# Altium PCB PIC32MM-Breakout.PcbDoc
Units mm, origin at the board's own origin, x right, y up, seen from the top; angles counter-clockwise.
Board outline 17.78 x 33.02 mm, 2 copper layers (Top Layer, Bottom Layer), stack 1.569 mm thick; 7 components, 20 nets, 52 pads, 3 vias.
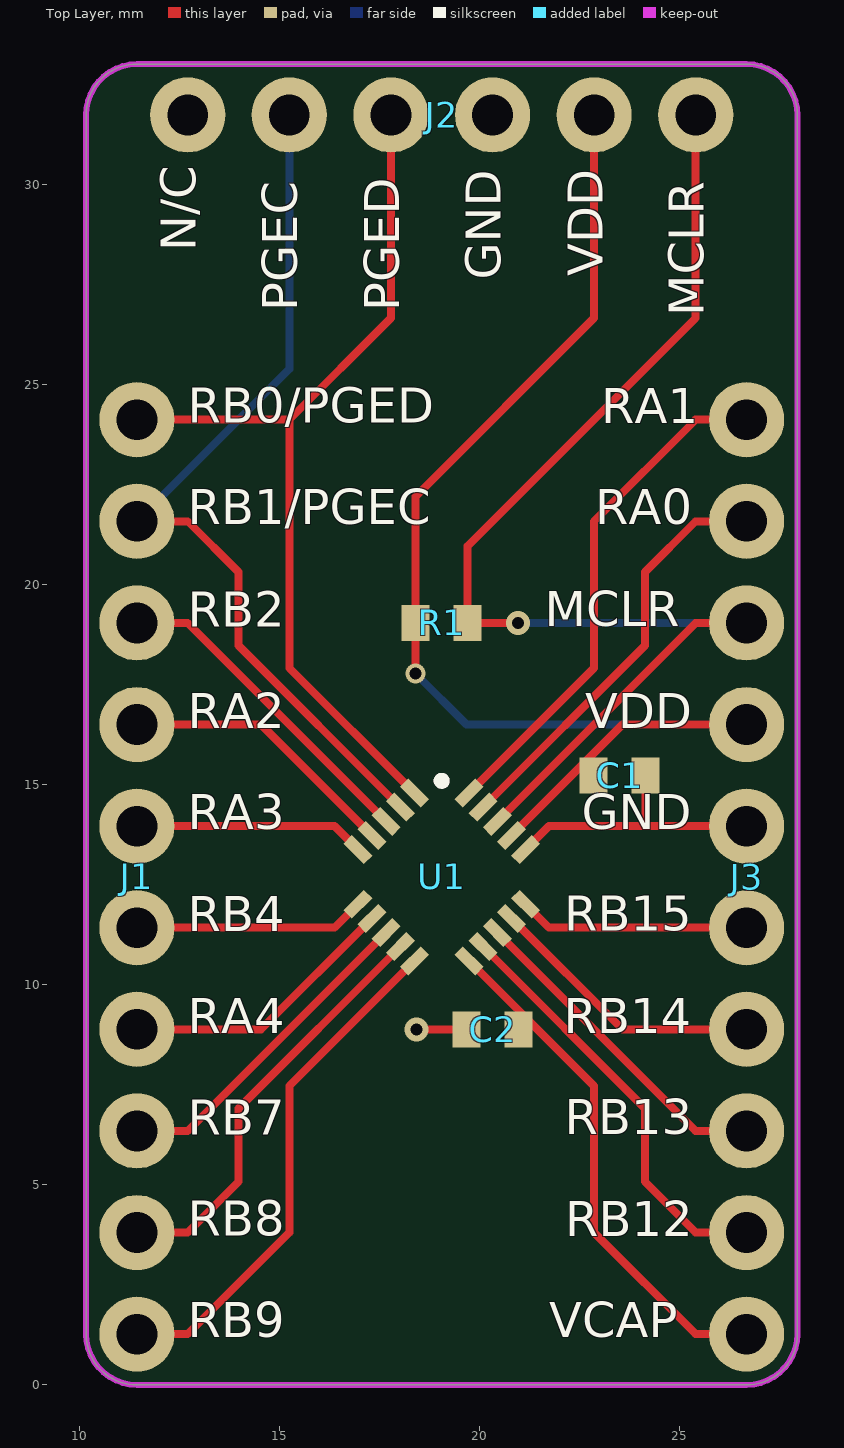
[diagram p0: Top Layer view]
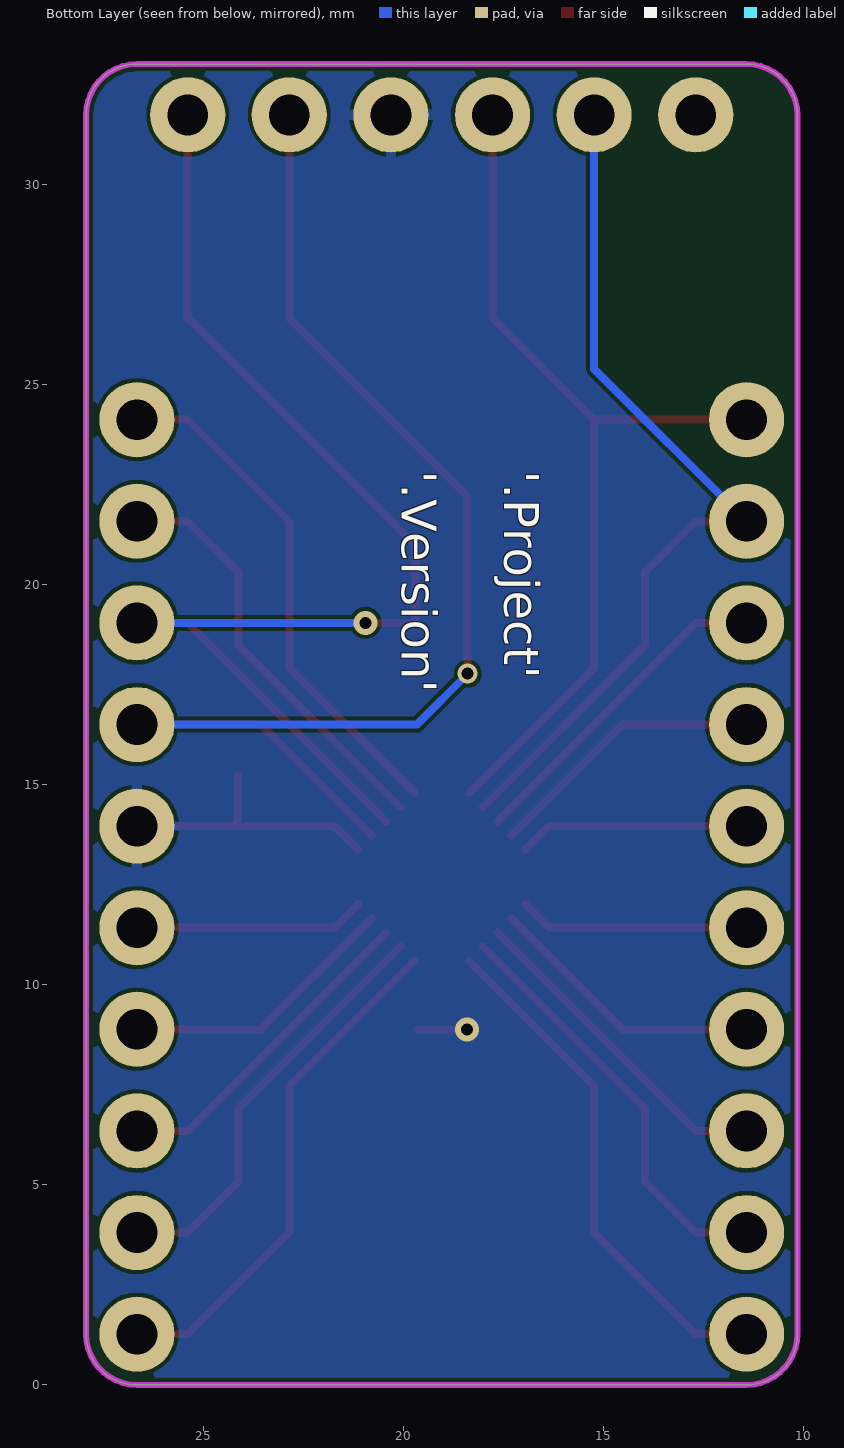
[diagram p1: Bottom Layer view, seen from below]
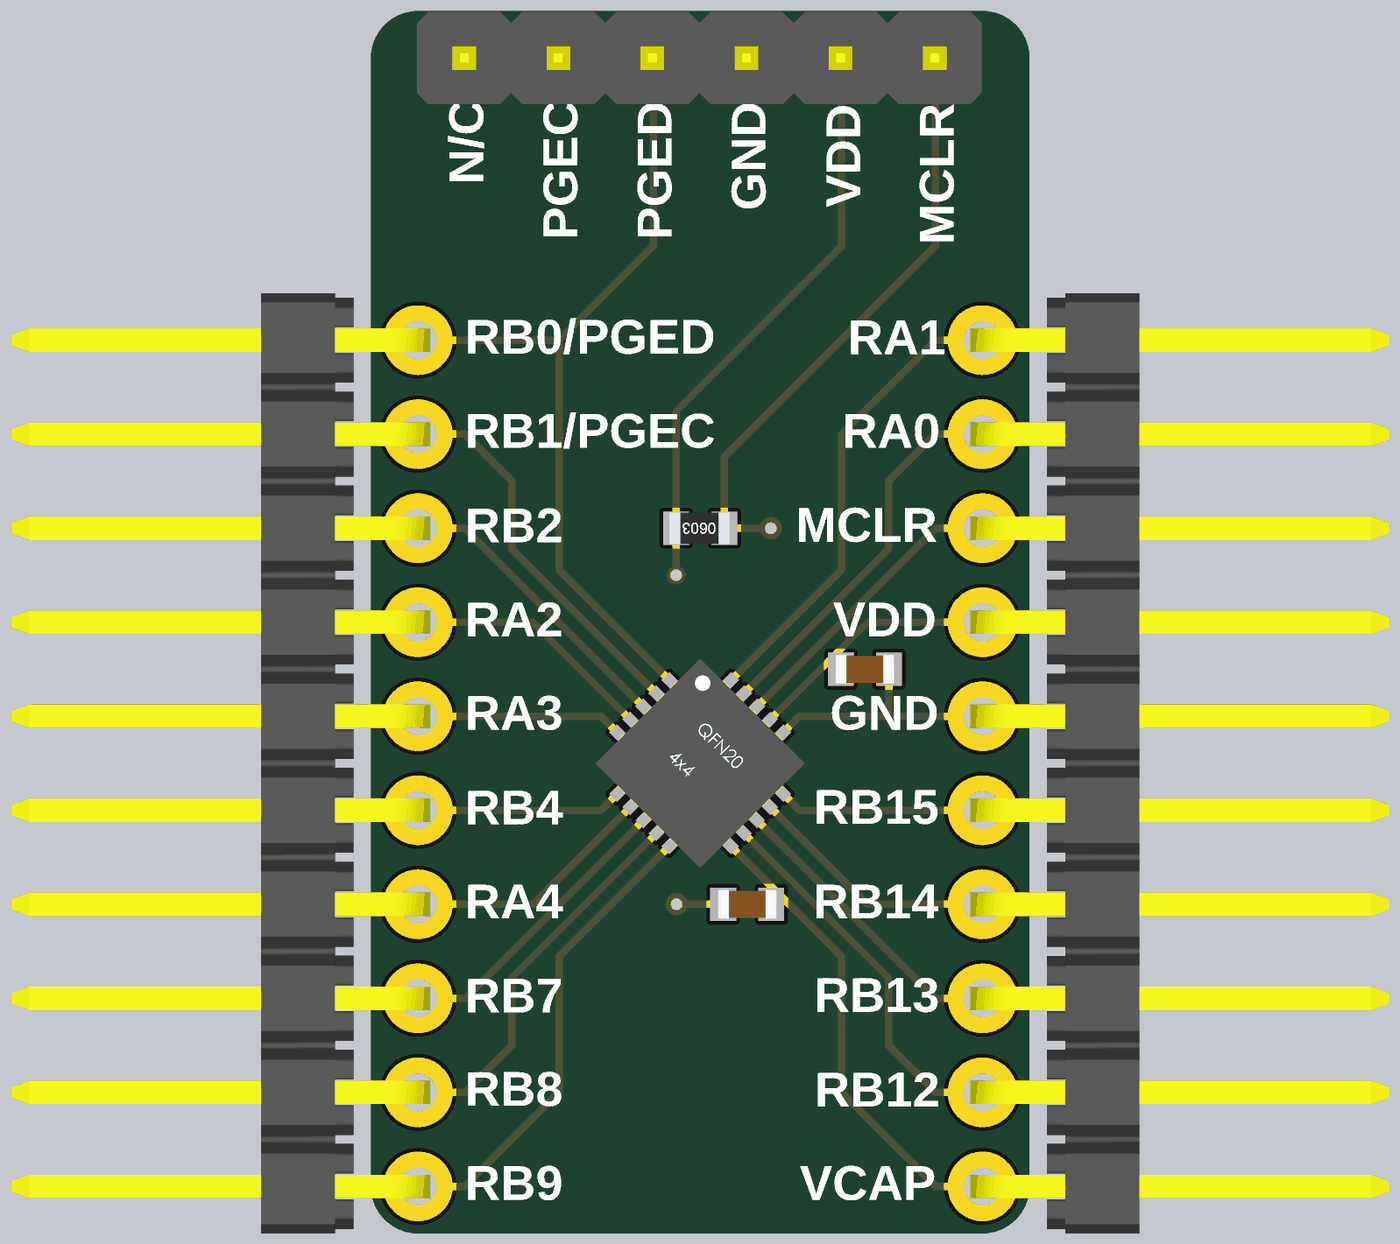
[diagram p2: 3D render of the assembled board from above, using the file's embedded part models]

## Layer stack, top to bottom
Top Solder: solder mask 0.0254, SM-001, Dk 4
Top Layer: signal copper 0.035
Dielectric 1: core 1.4986, Core-043, Dk 4.3
Bottom Layer: signal copper 0.035
Bottom Solder: solder mask 0.0254, SM-001, Dk 4

## Board outline
10.16,1.27 10.16,31.75 cw(c11.43,31.75) 11.43,33.02 26.67,33.02 cw(c26.67,31.75) 27.94,31.75 27.94,1.27 cw(c26.67,1.27) 26.67,0 11.43,0 cw(c11.43,1.27)

## Design rules (kind name [scope] priority, off if disabled: settings)
Clearance [All] p1: gap=0.1 ignorepadtopadclearanceinfootprint=FALSE except(0: Arc-Hole Track-Hole SMDPad-Hole THPad-Hole Via-Hole Fill-Hole Poly-Hole Region-Hole Text-Hole)
DiffPairsRouting [All] p1: maxlimit=0.254 minlimit=0.1 mostfreqgap=0.1 toplayer_minwidth=0.1 toplayer_maxwidth=0.381 toplayer_prefwidth=0.1 bottomlayer_minwidth=0.1 bottomlayer_maxwidth=0.381 bottomlayer_prefwidth=0.1 maxuncoupledlength=12.7
MinimumSolderMaskSliver [All] p1: minsoldermaskwidth=0
PlaneClearance [All] p1: clearance=0.2
PlaneConnect [All] p1: planeconnectstyle=Direct reliefexpansion=0.508 reliefentries=4 reliefconductorwidth=0.254 reliefairgap=0.254
PolygonConnect [All] p1: thpad.connectstyle=Relief thpad.reliefconductorwidth=0.254 thpad.reliefentries=4 thpad.polygonreliefangle="90 Angle" thpad.airgapwidth=0.1 smdpad.connectstyle=Relief smdpad.reliefconductorwidth=0.254 smdpad.reliefentries=4 smdpad.polygonreliefangle="90 Angle" smdpad.airgapwidth=0.1 via.connectstyle=Direct via.reliefconductorwidth=0.254 via.reliefentries=4 via.polygonreliefangle="90 Angle" via.airgapwidth=0.254
RoutingVias [All] p1: holewidth=0.711 width=1.27 viastyle="Through Hole" minholewidth=0.2 minwidth=0.4 maxholewidth=0.711 maxwidth=1.27
SilkToSolderMaskClearance [IsPad] p1: minsilkscreentomaskgap=0.1 clearancetoexposedcopper=TRUE
SolderMaskExpansion [All] p1: expansion=0.102 istentingtop=FALSE
Width [All] p1: maxlimit=1 minlimit=0.1 preferedwidth=0.1
25 further rules are at their usual default settings.

## Classes and differential pairs
component class PIC32MM-Breakout: C1 C2 J1 J2 R1 U1

## Components (designator, comment, footprint, x,y, rotation, side; value= is the part's Value field where it differs from the comment)
C1 "100nF" "Capacitor 0603" 23.495,15.24 r180 top
C2 "10uF" "Capacitor 0603" 20.32,8.89 r0 top
J1 "Molex 90121-0770" "Molex 90121-0770" 11.43,24.13 r0 top
J2 "MOLEX-95501-2661" "Molex 90120-0926" 19.05,31.75 r270 top
J3 "Molex 90121-0770" "Molex 90121-0770" 26.67,1.27 r180 top
R1 "10kR" "Resistor 0603" 19.05,19.05 r180 top
U1 "PIC32MM0064GPL020-I/ML" QFN-20 19.05,12.7 r315 top

## Footprints (in the part's own frame and the unit in brackets; to place one, negate y for a bottom-side part, rotate by r counter-clockwise, add the part's x,y. Pads: shape width x height; smd on the part's side, far side on the other; paste and mask are expansions set on the pad)
"Capacitor 0603" [mm]
  rect 0.7x0.9 smd: 1(-0.65,0) 2(0.65,0)
  body extent -0.8,-0.4 0.8,0.4, height 0.78
"Molex 90120-0926" [mil]
  round 74 hole 40: 1(0,250) 2(0,150) 3(0,50) 4(0,-50) 5(0,-150) 6(0,-250)
  body extent -49,-301 49,299, height 336
"Molex 90121-0770" [mil]
  round 74 hole 40: 1(0,0) 2(0,-100) 3(0,-200) 4(0,-300) 5(0,-400) 6(0,-500) 7(0,-600) 8(0,-700) 9(0,-800) 10(0,-900)
  body extent -433,-950 13,50, height 142
QFN-20 [mm]
  rect 0.73x0.3 smd: 1(-1.965,1) 2(-1.965,0.5) 3(-1.965,0) 4(-1.965,-0.5) 5(-1.965,-1) 11(1.965,-1) 12(1.965,-0.5) 13(1.965,0) 14(1.965,0.5) 15(1.965,1)
  rect 0.3x0.73 smd: 6(-1,-1.965) 7(-0.5,-1.965) 8(0,-1.965) 9(0.5,-1.965) 10(1,-1.965) 16(1,1.965) 17(0.5,1.965) 18(0,1.965) 19(-0.5,1.965) 20(-1,1.965)
  silkscreen extent -1.8,1.6 -1.6,1.8, body extent -2.02,-2.02 2.02,2.02, height 0.8
"Resistor 0603" [mm]
  rect 0.7x0.9 smd: 1(-0.65,0) 2(0.65,0)
  body extent -0.8,-0.42 0.84,0.43, height 0.44

## Part data
C1 C2: library part Capacitor
J2: library part "MPLAB ICSP"
R1: library part Resistor

## Via types
v1: diameter 0.6, hole 0.3, Top Layer to Bottom Layer, tented both sides, 2 vias
v2: diameter 0.5, hole 0.3, Top Layer to Bottom Layer, tented both sides, 1 vias

## Nets (pads, with @x,y where several pads share a name; then routed paths per layer and width w, separated by ;. In a path a pad name is that pad's centre, name@x,y a point inside that pad or via, vN(x,y) a via of type N, cw(c..) or ccw(c..) an arc to the next point about the centre after c; other vN are vias at no path point)
GND: C1.1 C2.1 J2.3 J3.6 U1.16 | length 8.3
  Top Layer w0.2: v1(18.415,8.89) C2.1 ; U1.16 21.734,13.97 24.202,13.97 ; C1.1 24.145,14.027 24.202,13.97 ; J3.6 24.202,13.97
MCLR: J2.1 J3.8 R1.1 U1.18 | length 30.3
  Top Layer w0.2: U1.18 25.4,19.05 J3.8 ; v1(20.955,19.05) R1.1 19.7,20.97 25.4,26.67 J2.1
  Bottom Layer w0.2: v1(20.955,19.05) J3.8
RA0: J3.9 U1.19 | length 10.6
  Top Layer w0.2: U1.19 24.13,18.487 24.13,20.32 25.4,21.59 J3.9
RA1: J3.10 U1.20 | length 13
  Top Layer w0.2: U1.20 22.86,17.924 22.86,21.59 25.4,24.13 J3.10
RA2: J1.4 U1.4 | length 7
  Top Layer w0.2: J1.4 14.533,16.51 U1.4
RA3: J1.5 U1.5 | length 5.8
  Top Layer w0.2: J1.5 16.366,13.97 U1.5
RA4: J1.7 U1.7 | length 7
  Top Layer w0.2: J1.7 14.533,8.89 U1.7
RB0: J1.1 J2.4 U1.1 | length 23.1
  Top Layer w0.2: J1.1 15.24,24.13 ; J2.4 17.78,26.67 15.24,24.13 ; U1.1 15.24,17.924 15.24,24.13
RB1: J1.2 J2.5 U1.2 | length 22.4
  Top Layer w0.2: J1.2 12.7,21.59 13.97,20.32 13.97,18.487 U1.2
  Bottom Layer w0.2: J1.2 15.24,25.4 J2.5
RB2: J1.3 U1.3 | length 8.3
  Top Layer w0.2: J1.3 12.7,19.05 U1.3
RB4: J1.6 U1.6 | length 5.8
  Top Layer w0.2: J1.6 16.366,11.43 U1.6
RB7: J1.8 U1.8 | length 8.3
  Top Layer w0.2: J1.8 12.7,6.35 U1.8
RB8: J1.9 U1.9 | length 10.6
  Top Layer w0.2: J1.9 12.7,3.81 13.97,5.08 13.97,6.913 U1.9
RB9: J1.10 U1.10 | length 13
  Top Layer w0.2: J1.10 12.7,1.27 15.24,3.81 15.24,7.476 U1.10
RB12: J3.2 U1.12 | length 10.6
  Top Layer w0.2: U1.12 24.13,6.913 24.13,5.08 25.4,3.81 J3.2
RB13: J3.3 U1.13 | length 8.3
  Top Layer w0.2: U1.13 25.4,6.35 J3.3
RB14: J3.4 U1.14 | length 7
  Top Layer w0.2: U1.14 23.567,8.89 J3.4
RB15: J3.5 U1.15 | length 5.8
  Top Layer w0.2: U1.15 21.734,11.43 J3.5
VCAP: C2.2 J3.1 U1.11 | length 13
  Top Layer w0.2: U1.11 22.86,7.476 22.86,3.81 25.4,1.27 J3.1
VDD: C1.2 J2.2 J3.7 R1.2 U1.17 | length 31.6
  Top Layer w0.2: v2(18.4,17.78) R1.2 18.4,22.21 22.86,26.67 J2.2 ; U1.17 23.567,16.51 J3.7
  Bottom Layer w0.2: v2(18.4,17.78) 19.67,16.51 J3.7
pads on no net: J2.6

## Polygon pours and split planes (outlines as drawn)
GND on Bottom Layer "GND_L02_P000" (solid, remove dead copper, pour order 0): 10.16,33.02 27.94,33.02 27.94,0 10.16,0

## Keep-outs
Keep-Out Layer:
  the board outline again, w0.15

## Silkscreen, mask and mechanical layers (free items; w line width, h text height)
Top Overlay:
  text "N/C" at 13.191,28.339 h1.5 r90
  text "VDD" at 23.368,27.717 h1.5 r90
  text "GND" at 20.811,27.632 h1.5 r90
  text "PGEC" at 15.731,26.848 h1.5 r90
  text "PGED" at 18.271,26.846 h1.5 r90
  text "MCLR" at 25.891,26.711 h1.5 r90
  text "RB0/PGED" at 12.7,23.766 h1.5
  text "RA1" at 23.035,23.749 h1.5
  text "RB1/PGEC" at 12.7,21.226 h1.5
  text "RA0" at 22.883,21.226 h1.5
  text "MCLR" at 21.631,18.686 h1.5
  text "RB2" at 12.7,18.669 h1.5
  text "RA2" at 12.7,16.129 h1.5
  text "VDD" at 22.637,16.129 h1.5
  text "RA3" at 12.7,13.606 h1.5
  text "GND" at 22.552,13.606 h1.5
  text "RB15" at 22.112,11.066 h1.5
  text "RB4" at 12.7,11.049 h1.5
  text "RA4" at 12.7,8.509 h1.5
  text "RB14" at 22.102,8.509 h1.5
  text "RB13" at 22.129,5.986 h1.5
  text "RB7" at 12.7,5.969 h1.5
  text "RB8" at 12.7,3.446 h1.5
  text "RB12" at 22.139,3.429 h1.5
  text "RB9" at 12.7,0.906 h1.5
  text "VCAP" at 21.738,0.906 h1.5
Bottom Overlay:
  text "'.Project'" at 17.78,22.86 h1.5 r90
  text "'.Version'" at 20.337,22.86 h1.5 r90